# Altium PCB UWB_board.PcbDoc
Units mm, origin at the board's own origin, x right, y up, seen from the top; angles counter-clockwise.
Board outline 31.7 x 44.9 mm, 6 copper layers (Top Layer, Top Ground, Mid Layer, MCU_3V3, Bottom Ground, Bottom Layer), stack 1.597 mm thick; 55 components, 50 nets, 251 pads, 143 vias.
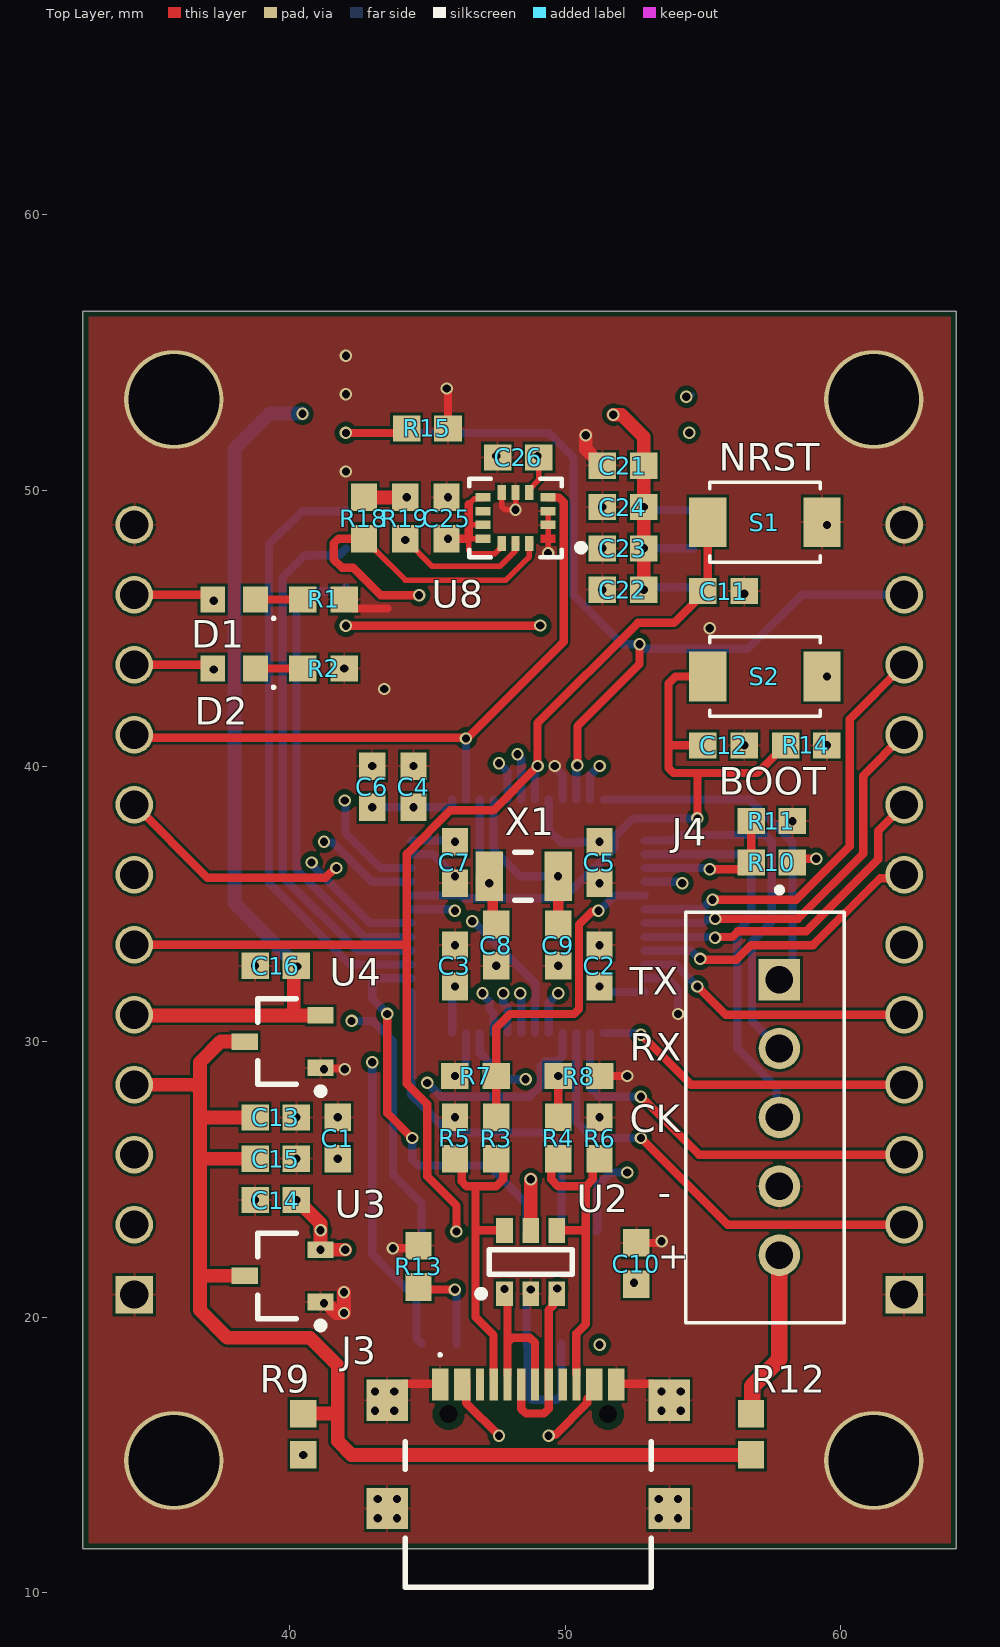
[diagram p0: Top Layer view]
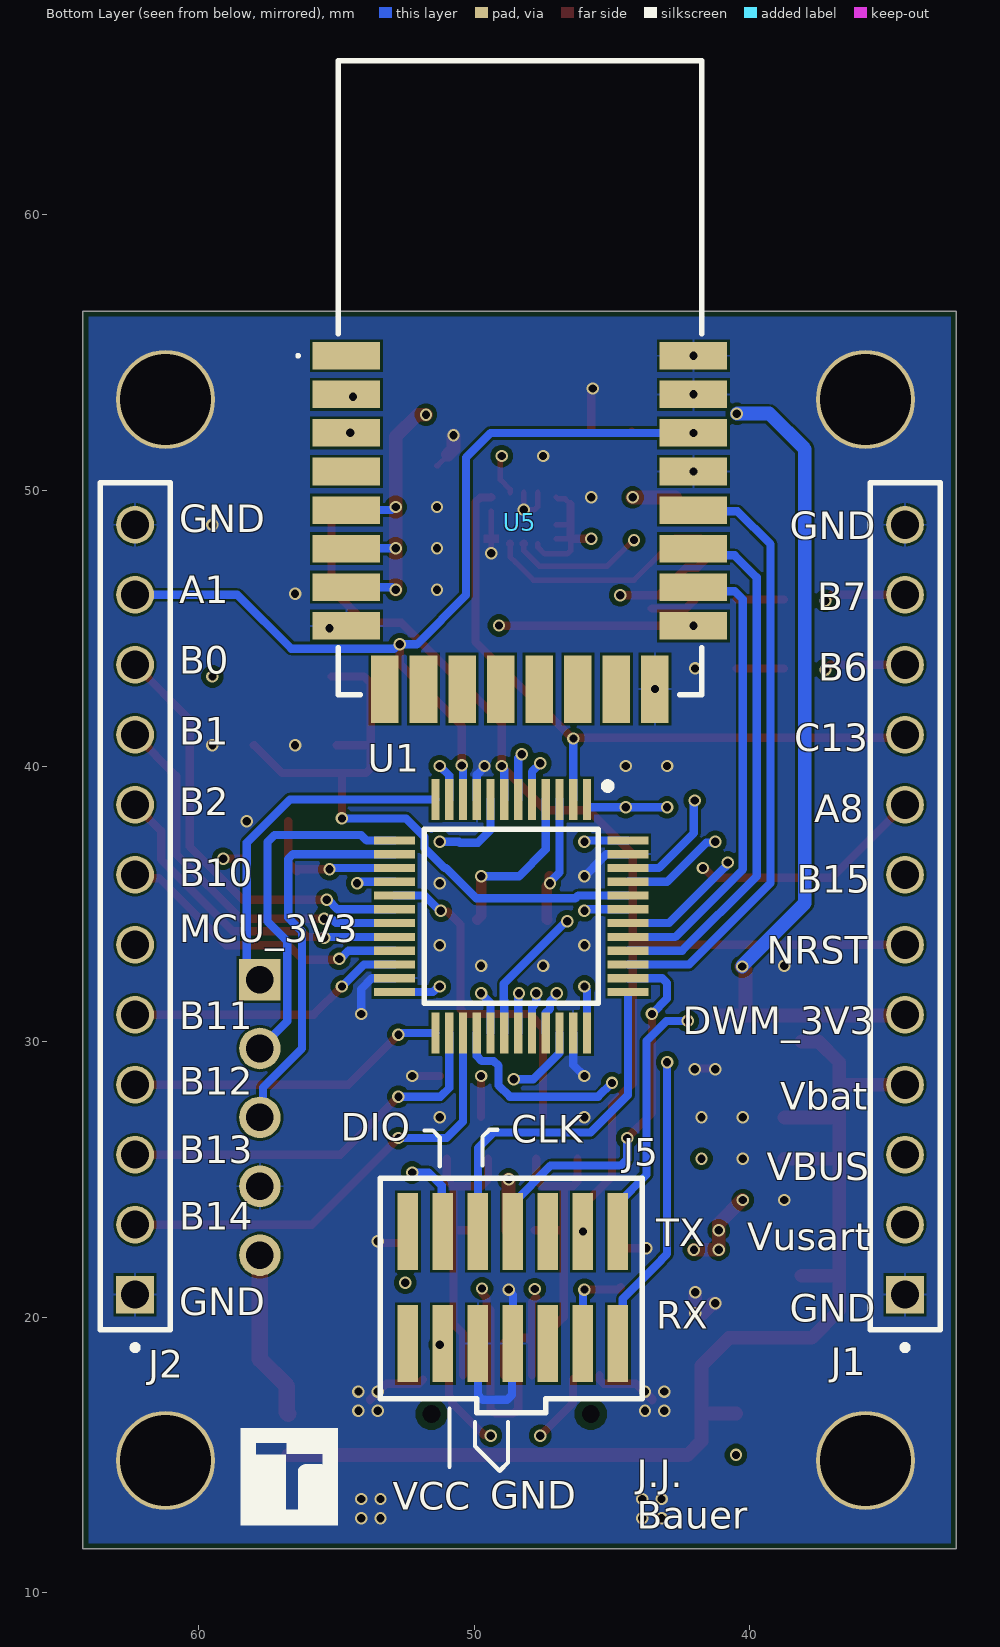
[diagram p1: Bottom Layer view, seen from below]
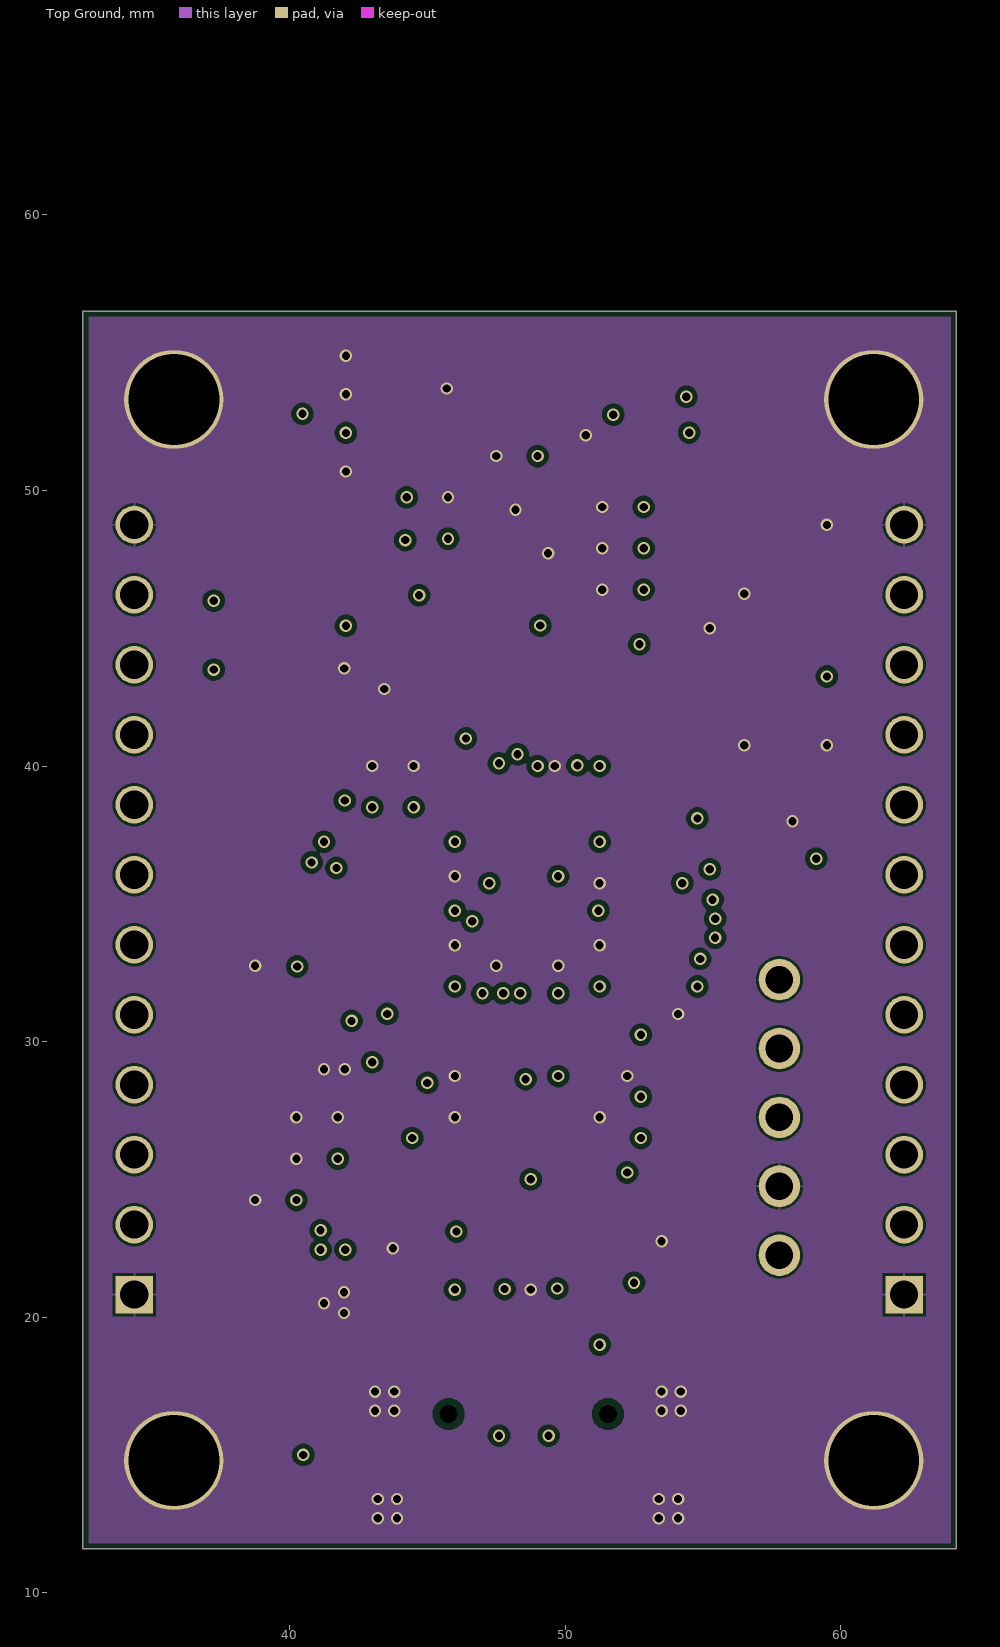
[diagram p2: Top Ground]
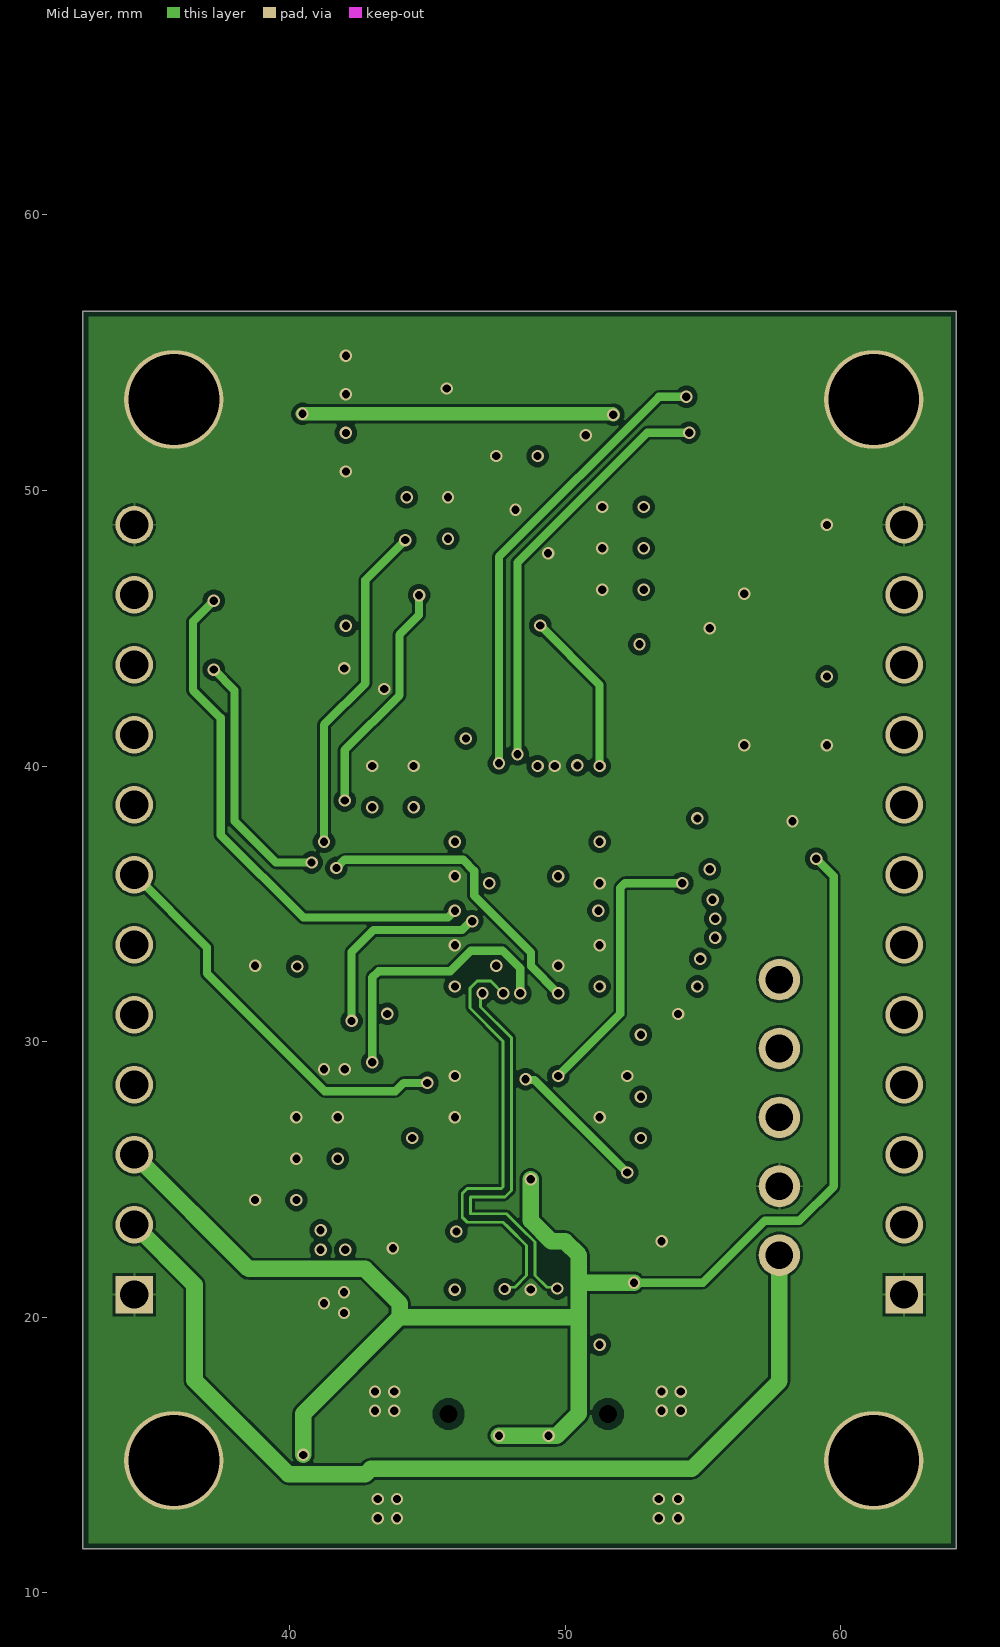
[diagram p3: Mid Layer]
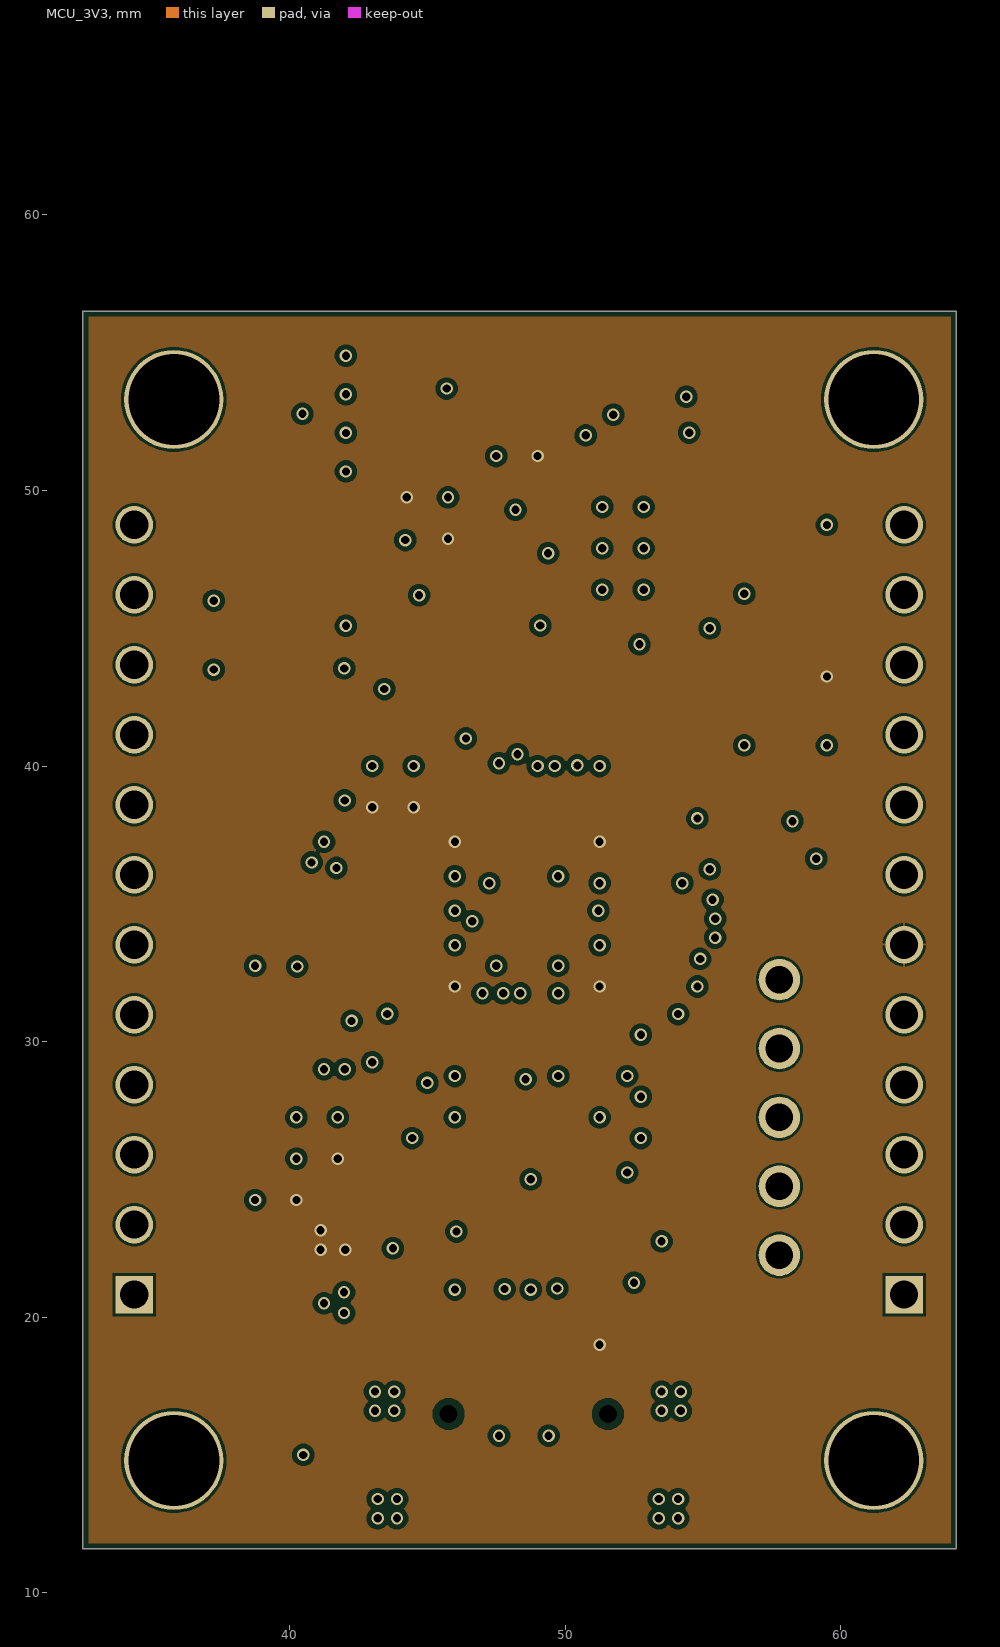
[diagram p4: MCU_3V3]
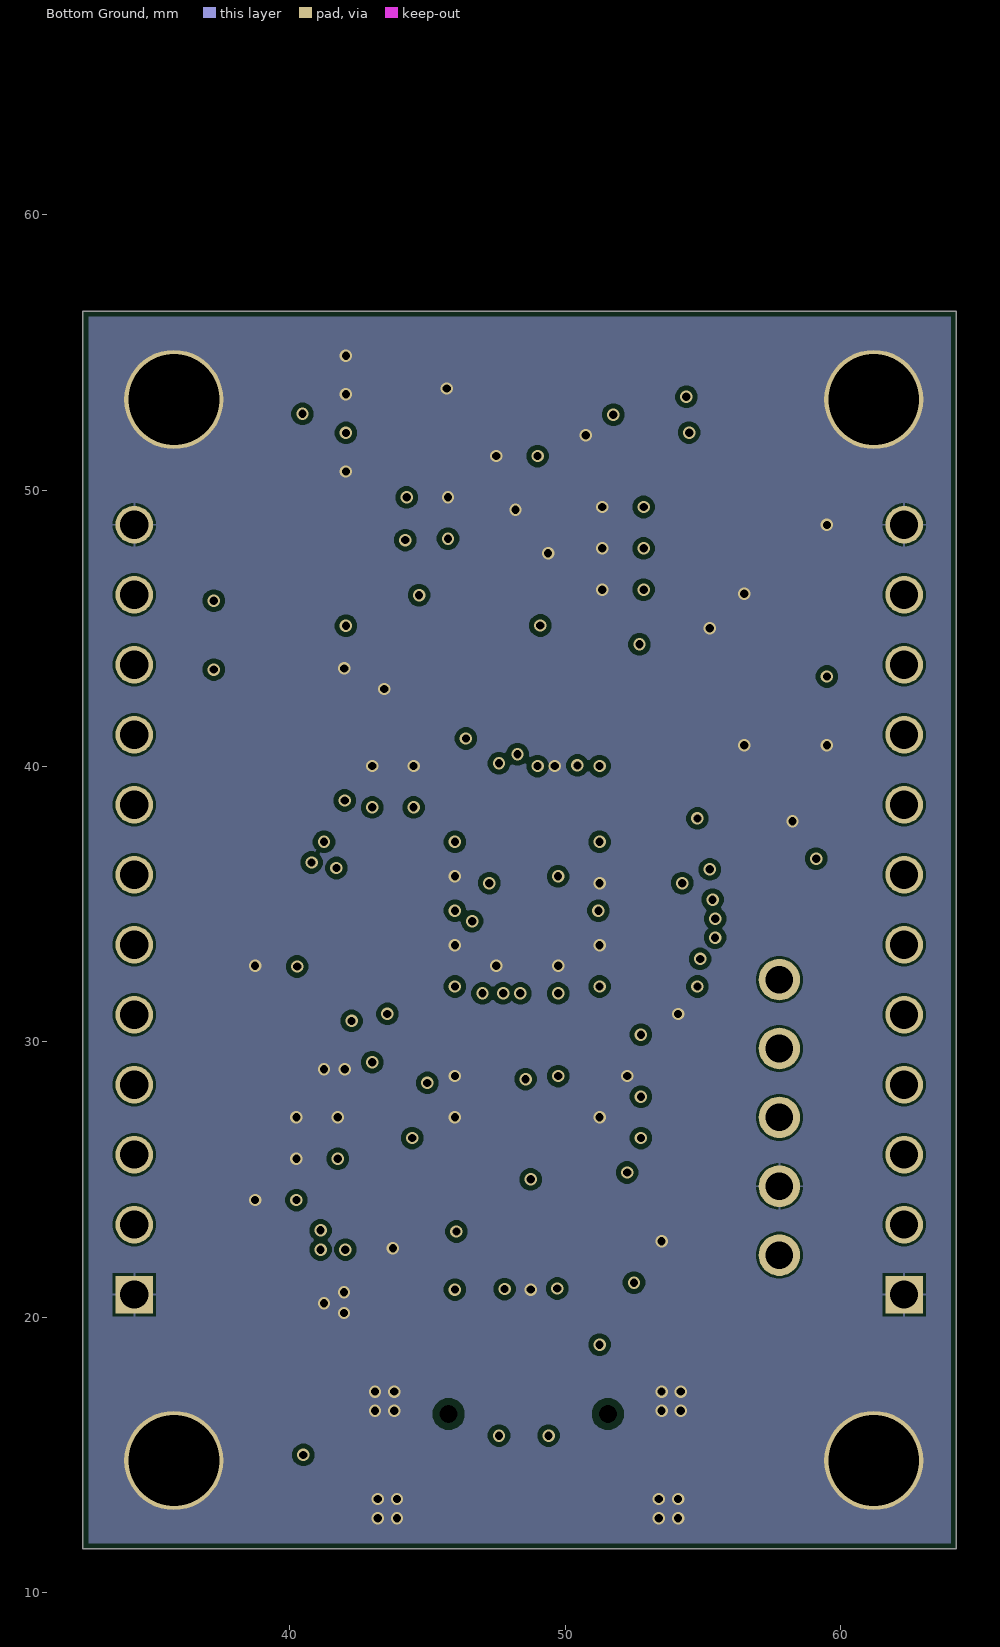
[diagram p5: Bottom Ground]
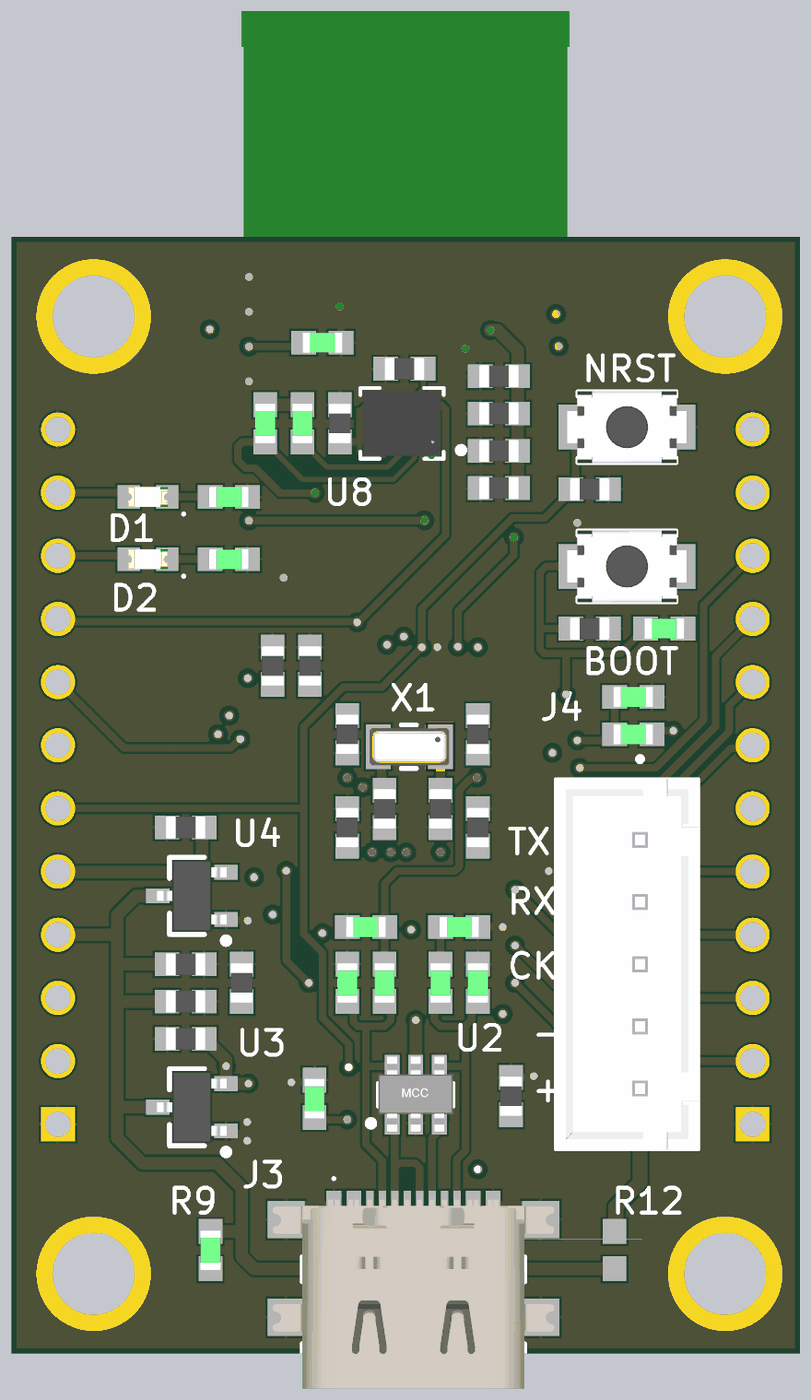
[diagram p6: 3D render of the assembled board from above, using the file's embedded part models]
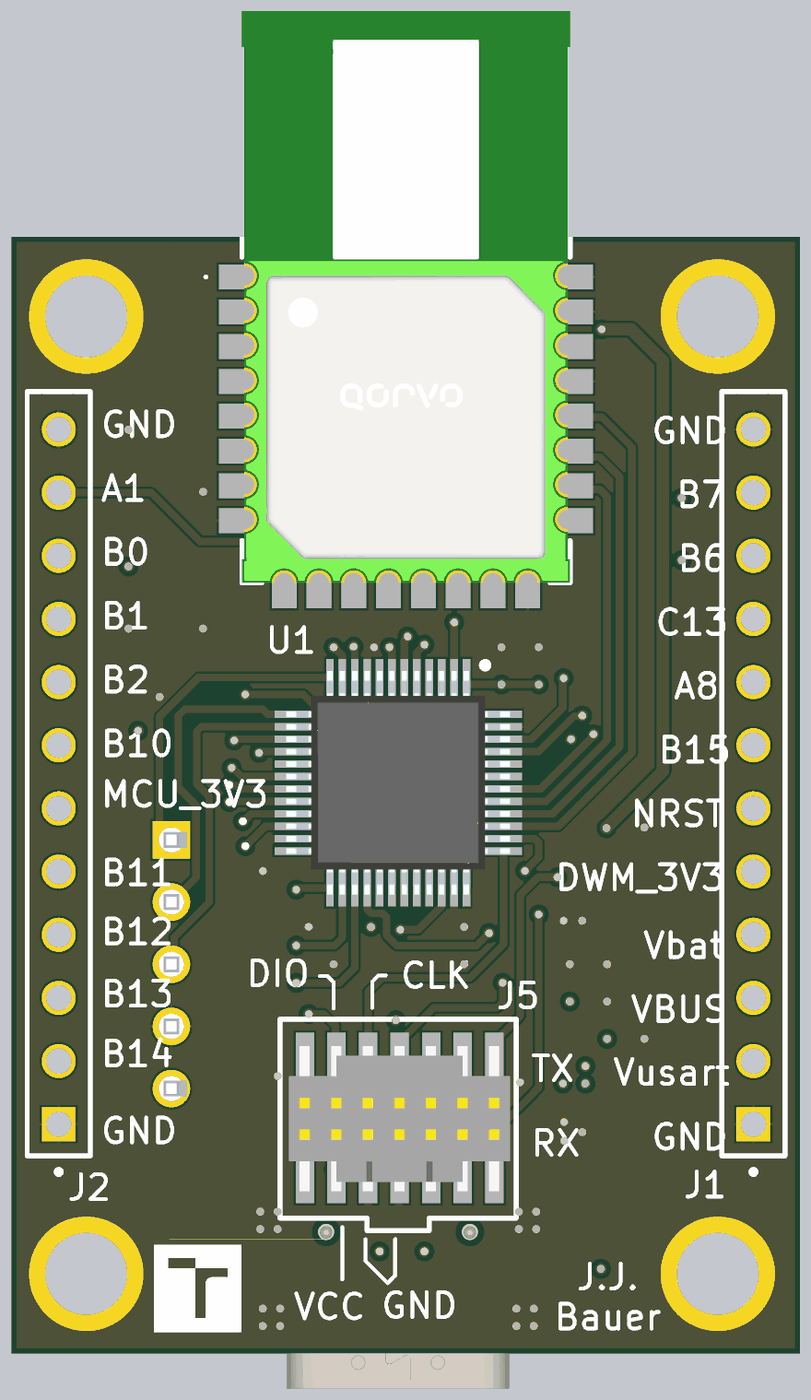
[diagram p7: 3D render of the assembled board from below, using the file's embedded part models]

## Layer stack, top to bottom
Top Solder: solder mask 0.0127, Solder Resist, Dk 3.8
Top Layer: signal copper 0.035
Dielectric 1: prepreg 0.1, 2313, Dk 4.05
Top Ground: signal copper 0.0175
Core 1: core 0.565, FR-4, Dk 4.5
Mid Layer: signal copper 0.0175
Dielectric 2: prepreg 0.127, 2116, Dk 4.25
MCU_3V3: signal copper 0.0175
Core 2: core 0.565, FR-4, Dk 4.5
Bottom Ground: signal copper 0.0175
Dielectric 3: prepreg 0.1, 2313, Dk 4.05
Bottom Layer: signal copper 0.035
Bottom Solder: solder mask 0.0127, Solder Resist, Dk 3.8

## Board outline
32.5,11.6 32.5,56.5 64.2,56.5 64.2,11.6

## Design rules (kind name [scope] priority, off if disabled: settings)
BoardOutlineClearance [All] p1: gap=0.2 ignorepadtopadclearanceinfootprint=FALSE
Clearance [All] p1: gap=0.089 ignorepadtopadclearanceinfootprint=TRUE except(0.127: Arc-Via Track-Via SMDPad-Via THPad-Via Via-Via Via-Fill Via-Poly Via-Region Via-Text; 0.25: Arc-Hole Track-Hole SMDPad-Hole THPad-Hole Via-Hole Fill-Hole Poly-Hole Region-Hole Text-Hole)
ComponentClearance [All] p1: gap=0.089 collisioncheckmode=3 verticalgap=0.089 showdistances=TRUE
DiffPairsRouting [All] p1: maxlimit=0.254 minlimit=0.089 mostfreqgap=0.089 toplayer_prefgap=0.102 toplayer_minwidth=0.089 toplayer_maxwidth=1816.048 toplayer_prefwidth=0.102 midlayer1_maxgap=0.089 midlayer1_minwidth=0.089 midlayer1_maxwidth=1816.048 midlayer1_prefwidth=0.089 midlayer2_prefgap=0.203 midlayer2_minwidth=0.089 midlayer2_maxwidth=1816.048 midlayer2_prefwidth=0.102 midlayer3_maxgap=0.089 midlayer3_minwidth=0.089 midlayer3_maxwidth=1816.048 midlayer3_prefwidth=0.089 midlayer4_maxgap=0.089 midlayer4_minwidth=0.089 midlayer4_maxwidth=1816.048 midlayer4_prefwidth=0.089 bottomlayer_prefgap=0.102 bottomlayer_minwidth=0.089 bottomlayer_maxwidth=1816.048 bottomlayer_prefwidth=0.102 maxuncoupledlength=12.7
Height [All] p1: minheight=0 maxheight=1816.048 prefheight=12.7
HoleSize [All] p1: absolutevalues=TRUE maxlimit=6.3 minlimit=0.2 maxpercent=80.000 minpercent=20.000
HoleToHoleClearance [All] p1: gap=0.25 allowstackedmicrovias=FALSE
MinimumAnnularRing [All] p1: minimumring=0.05
MinimumSolderMaskSliver [All] p1: minsoldermaskwidth=0
PlaneClearance [All] p1: clearance=0.089
PlaneConnect PlaneConnectPowerPads [InPadClass('PowerPads')] p1: planeconnectstyle=Direct reliefexpansion=0.508 reliefentries=4 reliefconductorwidth=0.254 reliefairgap=0.254
PlaneConnect [All] p2: pad.planeconnectstyle=Relief pad.reliefexpansion=0.3 pad.reliefentries=4 pad.reliefconductorwidth=0.089 pad.reliefairgap=0.089 via.planeconnectstyle=Direct via.reliefexpansion=0.3 via.reliefentries=4 via.reliefconductorwidth=0.127 via.reliefairgap=0.127
PolygonConnect PolygonConnectPowerPads [All vs (InPadClass('PowerPads'))] p1: connectstyle=Direct reliefconductorwidth=0.254 reliefentries=4 polygonreliefangle="90 Angle" airgapwidth=0.254
PolygonConnect [All] p2: thpad.connectstyle=Relief thpad.reliefconductorwidth=0.089 thpad.reliefentries=4 thpad.polygonreliefangle="90 Angle" thpad.airgapwidth=0.089 smdpad.connectstyle=Relief smdpad.reliefconductorwidth=0.089 smdpad.reliefentries=4 smdpad.polygonreliefangle="90 Angle" smdpad.airgapwidth=0.089 via.connectstyle=Direct via.reliefconductorwidth=0.127 via.reliefentries=4 via.polygonreliefangle="90 Angle" via.airgapwidth=0.127
RoutingVias [All] p1: holewidth=0.3 width=0.45 viastyle="Through Hole" minholewidth=0.3 minwidth=0.4 maxholewidth=0.5 maxwidth=0.65
SilkToSilkClearance [All] p1: silktosilkclearance=0
SilkToSolderMaskClearance [IsPad] p1: minsilkscreentomaskgap=0.089 clearancetoexposedcopper=TRUE
SolderMaskExpansion [All] p1: expansion=0 istentingtop=FALSE
SolderMaskExpansion SolderMaskExpansion_1 [All] p2: expansion=0.075 istentingtop=FALSE
SupplyNets "Schematic Supply Nets" [InNet('GND')] p1: voltage=0.000
Width [All] p1: maxlimit=1816.048 minlimit=0.089 preferedwidth=0.089 toplayer_prefwidth=0.102 bottomlayer_prefwidth=0.102 minimp=50.000000 maximp=50.000000 favimp=50.000000
20 further rules are at their usual default settings.

## Classes and differential pairs
component class USB: C10 J3 R3 R4 R5 R6 R7 R8 R9 R10 R11 U2
component class Power: C13 C14 C15 C16 U3 U4
component class HID: C11 C12 D1 D2 R1 R2 R14 S1 S2
component class DWM1000: C21 C22 C23 C24 R15 U5
component class Connectors: J4 J5 R12 R13
component class Accelerometer: C25 C26 R18 R19 U?
component class LSE_Oscilator: C8 C9 X1
component class MCU: C1 C2 C3 C4 C5 C6 C7 J1 U1
differential pair D: +D_P -D_N

## Components (designator, comment, footprint, x,y, rotation, side; value= is the part's Value field where it differs from the comment)
C1 "10uF" 0603_cap 41.75,26.5 r270 top
C2 "100nF" 0603_cap 51.25,32.75 r270 top
C3 "100nF" 0603_cap 46,32.75 r270 top
C4 "100nF" 0603_cap 44.5,39.25 r270 top
C5 "100nF" 0603_cap 51.25,36.5 r90 top
C6 "1uF" 0603_cap 43,39.25 r270 top
C7 "100nF" 0603_cap 46,36.5 r90 top
C8 "18pF" 0603_cap 47.5,33.5 r90 top
C9 "18pF" 0603_cap 49.75,33.5 r90 top
C10 "2.2uF" 0603_cap 52.584,21.944 r90 top
C11 "100nF" 0603_cap 55.75,46.35 r180 top
C12 "100nF" 0603_cap 55.75,40.75 r180 top
C13 "1uF" 0603_cap 39.5,27.25 r180 top
C14 "1uF" 0603_cap 39.5,24.25 r0 top
C15 "1uF" 0603_cap 39.5,25.75 r180 top
C16 "1uF" 0603_cap 39.5,32.75 r0 top
C21 "1uF" 0603_cap 52.1,50.9 r0 top
C22 "100nF" 0603_cap 52.1,46.4 r0 top
C23 "100nF" 0603_cap 52.1,47.9 r0 top
C24 "100nF" 0603_cap 52.1,49.4 r0 top
C25 "100nF" 0603_cap 45.7,49 r270 top
C26 "100nF" 0603_cap 48.3,51.2 r0 top
D1 "KT-0603W" 0603_LED 37.984,46.044 r180 top
D2 "KT-0603R" 0603_LED 37.984,43.544 r180 top
J1 "PinHeader" PINs 34.365,20.816 r90 bottom locked
J2 "PinHeader" PINs 62.305,20.816 r90 bottom locked
J3 "USB C" UJ20CHGSMT5P16TR 48.661,13.882 r0 top locked
J4 "USART" JST_B5B-XH-A 57.25,27.25 r90 top locked
J5 "14 pin" FTSH14 52.405,19.038 r90 bottom locked
R1 "220" 0603_res 41.234,46.044 r180 top value=220Ω
R2 "820" 0603_res 41.234,43.544 r180 top value=820Ω
R3 "100k" 0603_res 47.5,26.5 r270 top
R4 "100k" 0603_res 49.75,26.5 r270 top
R5 "5.1k" 0603_res 46,26.5 r270 top value=5.1kΩ
R6 "5.1k" 0603_res 51.25,26.5 r270 top value=5.1kΩ
R7 "100k" 0603_res 46.75,28.75 r0 top
R8 "100k" 0603_res 50.5,28.75 r180 top
R9 "0R" 0603_res 40.5,15.75 r90 top value=0Ω
R10 "33k" 0603_res 57.5,36.5 r0 top value=33kΩ
R11 "82k" 0603_res 57.5,38 r180 top value=82kΩ
R12 "Empty 0603" 0603_empty 56.75,15.75 r90 top value="Inf Ω"
R13 "100k" 0603_res 44.684,21.844 r270 top
R14 "5.1k" 0603_res 58.75,40.75 r180 top value=5.1kΩ
R15 "82k" 0603_res 45,52.25 r180 top value=82kΩ
R18 "4.7k" 0603_res 42.7,49 r90 top value=4.7kΩ
R19 "4.7k" 0603_res 44.2,49 r90 top value=4.7kΩ
S1 "NRST" SW_TS-1088-AR02016 57.25,48.85 r180 top
S2 "BOOT" SW_TS-1088-AR02016 57.25,43.25 r180 top
U1 "STM32L433CCT" LQFP50 48.655,34.55 r270 bottom locked
U2 "ESD" sot-23-6L_ESD 48.75,22 r0 top locked
U3 "LDO" SOT95P280X120-3N 39.75,21.5 r0 top locked
U4 "LDO" SOT95P280X120-3N 39.75,30 r0 top locked
U5 "DWM3000" DWM1000 48.34,54.09 r180 bottom locked
U8 "LSM6DSVTR" LGA14-L_2p59x3P1x0P5_STM 48.2,49 r180 top locked (schematic designator U?)
X1 "Q13FC13500004" SMD3215-2P 48.5,36 r180 top

## Footprints (in the part's own frame and the unit in brackets; to place one, negate y for a bottom-side part, rotate by r counter-clockwise, add the part's x,y. Pads: shape width x height; smd on the part's side, far side on the other; paste and mask are expansions set on the pad)
0603_cap [mm] "2-Leads, Body 1,60x0,80mm, IPC Medium Density"
  rect 1x0.95 smd: 1(-0.75,0) 2(0.75,0)
  body extent -0.8,-0.45 0.8,0.45, height 0.8
0603_empty [mm] "2-Leads, Body 1,60x0,80mm, IPC Medium Density"
  rect 1x0.95 smd: 1(-0.75,0) 2(0.75,0)
0603_LED [mm] "Chip Diode, 2-Leads, Body 1,60x0,80mm, IPC Medium Density"
  rect 0.9x0.95 smd: A(0.775,0) C(-0.775,0)
  silkscreen extent -1.49,0.64 -1.39,0.74, body extent -0.8,-0.4 0.8,0.4, height 0.6
0603_res [mm] "2-Leads, Body 1,60x0,80mm, IPC Medium Density"
  rect 1x0.95 smd: 1(-0.75,0) 2(0.75,0)
  body extent -0.8,-0.4 0.8,0.4, height 0.55
DWM1000 [mm]
  rect 2.45x1 smd: 1(-6.295,0.8) 2(-6.295,-0.6) 3(-6.295,-2) 4(-6.295,-3.4) 5(-6.295,-4.8) 6(-6.295,-6.2) 7(-6.295,-7.6) 8(-6.295,-9) 17(6.295,-9) 18(6.295,-7.6) 19(6.295,-6.2) 20(6.295,-4.8) 21(6.295,-3.4) 22(6.295,-2) 23(6.295,-0.6) 24(6.295,0.8)
  rect 1x2.45 smd: 9(-4.9,-11.295) 10(-3.5,-11.295) 11(-2.1,-11.295) 12(-0.7,-11.295) 13(0.7,-11.295) 14(2.1,-11.295) 15(3.5,-11.295) 16(4.9,-11.295)
  silkscreen extent -8.1,-11.5 6.6,11.5, body extent -6.6,-11.5 6.6,11.5, height 3.15
FTSH14 [mm]
  rect 2.79x0.74 smd: 1(0,0) 2(4.07,0) 3(0,-1.27) 4(4.07,-1.27) 5(0,-2.54) 6(4.07,-2.54) 7(0,-3.81) 8(4.07,-3.81) 9(0,-5.08) 10(4.07,-5.08) 11(0,-6.35) 12(4.07,-6.35) 13(0,-7.62) 14(4.07,-7.62)
  silkscreen extent -2.5,-8.5 6,1, body extent -0.92,-8.25 4.92,0.64, height 6.11
JST_B5B-XH-A [mm]
  rect 1.508x1.508 / inner round 1.508 / far side rect 1.508x1.508 hole 1: 1(5,-0.525)
  round 1.508 hole 1: 2(2.5,-0.525) 3(0,-0.525) 4(-2.5,-0.525) 5(-5,-0.525)
  silkscreen extent -7.45,-2.88 8.35,2.88, body extent -7.45,-2.88 7.45,2.88, height 7
LGA14-L_2p59x3P1x0P5_STM [mil]
  round 1 smd paste+0 mask+0: 1(-46.5,29.53)
  rect 21x12 smd paste+0 mask+0: 2(-46.5,9.84) 3(-46.5,-9.84) 4(-46.5,-29.53) 8(46.5,-29.53) 9(46.5,-9.84) 10(46.5,9.84) 11(46.5,29.53)
  rect 12x21 smd paste+0 mask+0: 5(-19.68,-36.5) 6(0,-36.5) 7(19.68,-36.5) 12(19.68,36.5) 13(0,36.5) 14(-19.68,36.5)
  Top Layer region: -36,35.53 -57,35.53 -57,23.53 -36,23.53
  silkscreen extent -98,-56 66,56, body extent -61,-51 61,51, height 34
LQFP50 [mm]
  rect 1.475x0.3 smd: 1(-4.238,2.75) 2(-4.238,2.25) 3(-4.238,1.75) 4(-4.238,1.25) 5(-4.238,0.75) 6(-4.238,0.25) 7(-4.238,-0.25) 8(-4.238,-0.75) 9(-4.238,-1.25) 10(-4.238,-1.75) 11(-4.238,-2.25) 12(-4.238,-2.75) 25(4.238,-2.75) 26(4.238,-2.25) 27(4.238,-1.75) 28(4.238,-1.25) 29(4.238,-0.75) 30(4.238,-0.25) 31(4.238,0.25) 32(4.238,0.75) 33(4.238,1.25) 34(4.238,1.75) 35(4.238,2.25) 36(4.238,2.75)
  rect 0.3x1.475 smd: 13(-2.75,-4.238) 14(-2.25,-4.238) 15(-1.75,-4.238) 16(-1.25,-4.238) 17(-0.75,-4.238) 18(-0.25,-4.238) 19(0.25,-4.238) 20(0.75,-4.238) 21(1.25,-4.238) 22(1.75,-4.238) 23(2.25,-4.238) 24(2.75,-4.238) 37(2.75,4.238) 38(2.25,4.238) 39(1.75,4.238) 40(1.25,4.238) 41(0.75,4.238) 42(0.25,4.238) 43(-0.25,4.238) 44(-0.75,4.238) 45(-1.25,4.238) 46(-1.75,4.238) 47(-2.25,4.238) 48(-2.75,4.238)
  silkscreen extent -4.85,-3.15 3.15,3.62, body extent -4.5,-4.5 4.5,4.5, height 1.6
PINs [mm]
  rect 1.37x1.37 hole 1.02: 1(0,0)
  round 1.37 hole 1.02: 2(2.54,0) 3(5.08,0) 4(7.62,0) 5(10.16,0) 6(12.7,0) 7(15.24,0) 8(17.78,0) 9(20.32,0) 10(22.86,0) 11(25.4,0) 12(27.94,0)
  silkscreen extent -2.02,-1.27 29.47,1.27
SMD3215-2P [mm]
  rect 1x1.8 smd mask+0.102: 1(-1.245,0)
  rect 1x1.8 smd: 2(1.25,0)
  silkscreen extent -0.27,-0.87 0.33,0.87, body extent -1.6,-0.75 1.6,0.75, height 0.81
SOT95P280X120-3N [mm] "SOT23, 3-Leads, Body 2,90x2,80mm, Pitch 0,95mm, IPC Medium Density"
  rect 0.95x0.6 smd: 1(1.375,-0.95) 2(1.375,0.95) 3(-1.375,0)
  silkscreen extent -0.9,-1.92 1.5,1.55, body extent -1.4,-1.45 1.4,1.45, height 1.3
sot-23-6L_ESD [mm] "SOT23, 6-Leads, Body 2,90x2,80mm, Pitch 0,95mm, IPC Medium Density"
  rect 0.6x0.9 smd: 1(-0.95,-1.15) 2(0,-1.15) 3(0.95,-1.15) 4(0.95,1.15) 5(0,1.15) 6(-0.95,1.15)
  silkscreen extent -1.92,-1.27 1.5,0.45, body extent -1.5,-1.48 1.5,1.53, height 1.11
SW_TS-1088-AR02016 [mm]
  rect 1.35x1.8 smd: 1(-2.075,0) 2(2.075,0)
  silkscreen extent -2,-1.45 2,1.45, body extent -2.4,-1.45 2.4,1.45, height 2
UJ20CHGSMT5P16TR [mm]
  rect 0.6x1.15 smd: A1(-3.2,3.678) A4(-2.4,3.678) B1(3.2,3.678) B4(2.4,3.678)
  rect 0.3x1.15 smd: A5(-1.25,3.678) A6(-0.25,3.678) A7(0.25,3.678) A8(1.25,3.678) B5(1.75,3.678) B6(0.75,3.678) B7(-0.75,3.678) B8(-1.75,3.678)
  round 0.325 hole 0.65 unplated: MH1(-2.89,2.603) MH2(2.89,2.603)
  rect 1.5x1.5 smd: MP1(-5.12,3.103) MP2(5.12,3.103) MP3(-5.12,-0.827) MP4(5.12,-0.827)
  silkscreen extent -4.47,-3.68 4.47,4.8, body extent -5.67,-3.7 5.67,3.9, height 3.18

## Part data
C1: library part CL10A106KP8NNNC, "100nF 50V X7R ±10% 0603 Multilayer Ceramic Capacitors MLCC - SMD/SMT ROHS", LCSC Part #=C19702
C2 C3 C4 C5 C7 C11 C12 C22 C23 C24 C25 C26: library part CC0603KRX7R9BB104, "100nF 50V X7R ±10% 0603 Multilayer Ceramic Capacitors MLCC - SMD/SMT ROHS", LCSC Part #=C14663
C6 C13 C14 C15 C16 C21: library part CL10A105KB8NNNC, "1uF 50V X5R ±10% 0603 Multilayer Ceramic Capacitors MLCC - SMD/SMT ROHS", LCSC Part #=C15849
C8 C9: library part CL10C180JB8NNNC, "18pF 50V C0G ±5% 0603 Multilayer Ceramic Capacitors MLCC - SMD/SMT ROHS", LCSC Part #=C1647
C10: library part CL10A225KO8NNNC, "2.2uF 16V X5R ±10% 0603 Multilayer Ceramic Capacitors MLCC - SMD/SMT ROHS", LCSC Part #=C23630
D1: "100mW 120° 2.6V~3.1V 360mcd 5mA Discrete Diode White Yellow Lens op View Mount 0603 LED Indication - Discrete ROHS", LCSC Part #=C2290
D2: "-40℃~+85℃ 120° 2.4V 20mA 300mcd 40mW 615nm~630nm 645nm Red Water Clear 0603 LED Indication - Discrete ROHS", LCSC Part #=C2286
J3: library part UJ20-C-H-G-SMT-5-P16-TR, "Type C, USB 2.0, 480 Mbps, 48 Vac, 5 A, Horizontal, Gold Plated 3u, Surface Mount with post, 16 pin, USB Receptacle", LCSC Part #=C22383469, Mouser Part Number=179-UJ20CHGSMT5P16TR
J4: library part S5B-XH-A_LF__SN_, "comunication to master"
J5: library part FTSH-107-01-LM-DV-K, "For SWD debug"
R1: library part 0603WAF2200T5E, "220Ω -55℃~+155℃ 100mW 75V Thick Film Resistor ±1% ±100ppm/℃ 0603 Chip Resistor - Surface Mount ROHS", LCSC Part #=C22962
R2: library part 0603WAF8200T5E, "820Ω -55℃~+155℃ 100mW 75V Thick Film Resistor ±1% ±100ppm/℃ 0603 Chip Resistor - Surface Mount ROHS", LCSC Part #=C23253
R3 R4 R7 R8 R13: library part 0603WAF1003T5E, "100kΩ -55℃~+155℃ 100kΩ 100mW 75V Thick Film Resistor ±1% ±100ppm/℃ 0603 Chip Resistor - Surface Mount ROHS", LCSC Part #=C25803
R5 R6 R14: library part 0603WAF5101T5E, "5.1kΩ -55℃~+155℃ 100mW 75V Thick Film Resistor ±1% ±100ppm/℃ 0603 Chip Resistor - Surface Mount ROHS", LCSC Part #=C23186
R9: library part 0603WAF0000T5E, "0Ω -55℃~+155℃ 100mW 75V Thick Film Resistor ±1% ±100ppm/℃ 0603 Chip Resistor - Surface Mount ROHS", LCSC Part #=C21189
R10: library part 0603WAF3302T5E, "33kΩ -55℃~+155℃ 100mW 75V Thick Film Resistor ±1% ±100ppm/℃ 0603 Chip Resistor - Surface Mount ROHS", LCSC Part #=C4216
R11 R15: library part 0603WAF8202T5E, "82kΩ -55℃~+155℃ 100mW 75V Thick Film Resistor ±1% ±100ppm/℃ 0603 Chip Resistor - Surface Mount ROHS", LCSC Part #=C23254
R12: library part 0603_empty, "empty space for 0603 device", LCSC Part #=None
R18 R19: library part 0603WAF4701T5E, "4.7kΩ -55℃~+155℃ 100mW 75V Thick Film Resistor ±1% ±100ppm/℃ 0603 Chip Resistor - Surface Mount ROHS", LCSC Part #=C23162
S1 S2: library part TS-1088-AR02016, "50mA 4mm 100MÎ© 100,000 Times 12V 160gf 3mm 2mm Round Button Vertical welding SPST SMD Tactile Switches ROHS", LCSC Part #=C720477
U1: Manufacturer_Name=STMicroelectronics, Manufacturer_Part_Number=STM32L433CCT
U2: library part SRV05-4, "-55℃~+155℃ 12.5V 1pF 5 5A 5V 5uA 6V 75W ESD IEC 61000-4-2 Unidirectional SOT-23-6L ESD and Surge Protection (TVS/ESD) ROHS", LCSC Part #=C7420376
U3 U4: library part XC6206P332MR-G, "-40℃~+85℃@(Ta) 1 1uA 200mA 3.3V 6V Fixed Over Current Protection Positive SOT-23-3L Voltage Regulators - Linear, Low Drop Out (LDO) Regulators ROHS", LCSC Part #=C5446
U5: library part DWM1000, "3.5 - 6.5 GHz Ultra-Wideband (UWB) Transceiver Module", Manufacturer_Name=Qorvo, Mouser Part Number=772-DWM1000, Datasheet Link=https://www.qorvo.com/products/d/da007948, Geometry.Height=3.15mm, Manufacturer_Part_Number=DWM1000, Mouser Price/Stock=https://www.mouser.co.uk/ProductDetail/Qorvo/DWM1000?qs=TiOZkKH1s2R6b5D6df63Pg%3D%3D
U8: library part LSM6DSVETR, "6-axis IMU with embedded sensor fusion, I3C, OIS/EIS for smart applications", LCSC Part #=C41785564
X1: "-40℃~+85℃ 12.5pF 32.768kHz 70kΩ Crystal Oscillator ±20ppm SMD3215-2P Crystals ROHS", LCSC Part #=C32346, ComponentLink1Description="New link", ComponentLink1URL=https://jlcpcb.com/partdetail/SeikoEpson-Q13FC13500004/C32346, Parameter=32,768kHz

## Free pads (board coordinates)
  round 3.6 hole 3.3 mask+0.5: 7(35.8,14.8) 7(35.8,53.3) 7(61.2,14.8) 7(61.2,53.3)

## Via types
v1: diameter 0.45, hole 0.3, Top Layer to Bottom Layer, tented both sides, 143 vias

## Nets (pads, with @x,y where several pads share a name; then routed paths per layer and width w, separated by ;. In a path a pad name is that pad's centre, name@x,y a point inside that pad or via, vN(x,y) a via of type N, cw(c..) or ccw(c..) an arc to the next point about the centre after c; other vN are vias at no path point)
CC1: J3.A5 R3.2 R5.2 U2.6 | length 11.5
  Top Layer w0.3: R5.2@46.25,25.75 46.25,24.926 46.426,24.75 46.75,24.75 ; J3.A5@47.405,17.89 47.405,19.345 46.75,20 46.75,23.25 ; R3.2@47.75,25.75 47.75,25 47.5,24.75 46.75,24.75 ; U2.6 46.85,23.15 46.75,23.25 ; 46.75,23.25 46.75,24.75
CC2: J3.B5 R4.2 R6.2 U2.4 | length 11.2
  Top Layer w0.3: R4.2@49.5,25.75 49.5,25 49.75,24.75 50.75,24.75 ; U2.4 50.65,23.15 ; J3.B5@50.405,17.89 50.405,19.405 50.75,19.75 50.75,24.75 ; R6.2@51,25.75 51,25 50.75,24.75
D_N: J3.A7 J3.B7 U1.32 U2.1 | length 23.2
  Top Layer w0.3: U2.1@47.749,20.706 47.905,20.55 47.905,19.074 ; J3.B7@47.905,17.89 47.905,19.074 ; J3.A7@48.905,17.89 48.905,19.074 48.729,19.25 48.081,19.25 47.905,19.074
  Mid Layer w0.103: v1(47.75,31.75) 47.299,32.202 46.813,32.202 46.548,31.937 46.548,31.214 47.75,30.012 47.75,25.5 47.75,24.729 47.69,24.668 46.446,24.668 46.266,24.489 46.266,23.625 46.446,23.445 47.752,23.445 47.953,23.244 48.602,22.595 48.602,21.512 48.178,21.087 47.869,21.087 v1(47.803,21.021)
  Bottom Layer w0.3: v1(47.75,31.75) 47.752,31.748 47.752,31.397 47.905,31.244 U1.32
D_P: J3.A6 J3.B6 U1.33 U2.3 | length 23.1
  Top Layer w0.3: J3.A6@48.405,17.89 48.405,16.676 48.581,16.5 49.229,16.5 49.405,16.676 49.405,20.255 49.55,20.4 49.55,20.7 U2.3
  Mid Layer w0.103: v1(47,31.75) 46.934,31.684 46.934,31.261 48.056,30.139 48.056,25.5 48.056,24.602 47.816,24.362 46.572,24.362 46.572,23.751 47.879,23.751 48.386,23.244 48.908,22.722 48.908,21.512 49.337,21.083 49.673,21.083 v1(49.716,21.04)
  Bottom Layer w0.3: v1(47,31.75) 47,31.709 47.252,31.457 47.252,31.19 47.405,31.037 U1.33
DWM_3V3: C16.2 C21.2 C22.2 C23.2 C24.2 J1.5 U4.2 U5.5 U5.6 U5.7 | length 55
  Top Layer w0.5: J1.5@34.391,30.95 40.15,30.95 ; C16.2@40.3,32.725 v1(40.275,32.725) 40.15,32.6 40.15,30.95 ; U4.2 40.15,30.95 ; v1(51.75,52.75) 52.05,52.75 52.85,51.95 C21.2 v1(52.85,49.4) v1(52.85,47.9) v1(52.85,46.4)
  Mid Layer w0.5: v1(40.469,52.781) 51.719,52.781 v1(51.75,52.75)
  Bottom Layer w0.3: v1(52.85,46.4) 52.891,46.4 52.981,46.49 U5.7 ; v1(52.85,47.9) 54.625,47.9 U5.6 ; v1(52.85,49.4) 52.891,49.4 53.001,49.29 U5.5
  Bottom Layer w0.5: v1(40.275,32.725) 40.275,32.75 38,35.025 38,51.5 39.293,52.793 40.457,52.793 v1(40.469,52.781)
GND: C1.1 C2.1 C3.1 C4.1 C5.1 C6.1 C7.1 C8.1 C9.1 C10.2 C11.1 C12.1 C13.1 C14.1 C15.1 C16.1 C21.1 C22.1 C23.1 C24.1 C25.1 C26.1 J1.1 J1.12 J2.1 J2.12 J3.A1 J3.B1 J3.MP1 J3.MP2 J3.MP3 J3.MP4 J4.4 J5.5 J5.7 pad.7 R1.1 R2.1 R5.1 R6.1 R7.1 R8.1 R11.1 R13.1 R14.1 R15.1 S1.1 U1.9 U1.23 U1.35 U1.47 U2.2 U3.1 U4.1 U5.8 U5.16 U5.21 U5.23 U5.24 U8.1 U8.2 U8.3 U8.6 U8.7 | length 32.9
  Top Layer w0.2: U8.7 47.7,49.417 47.817,49.3 v1(48.2,49.3) U8.6 ; U8.3 U8.2 U8.1 v1(49.381,47.719) v1@49.4,47.7 ; C21.1@50.95,51.3 50.95,51.275 51.325,50.9 C21.1
  Top Layer w0.3: v1(41.25,29) 41.275,29.025 41.975,29.025 v1(42,29) ; R1.1 42.309,45.719 43.552,45.719 ; v1(43.75,22.5) 44.59,22.5 R13.1 ; v1(43.8,17.3) 43.541,17.041 J3.MP1 44.141,17.585 45.311,17.585 45.455,17.729 J3.A1@45.455,17.89 ; v1(45.7,53.7) 45.7,53.659 45.75,53.609 R15.1 ; R8.1 v1(52.25,28.75) ; J3.B1@51.855,17.74 52.011,17.585 53.181,17.585 J3.MP2 53.781,17.019 v1(53.5,17.3) ; C10.2 53.403,22.694 53.459,22.75 v1(53.5,22.75)
  Top Layer w0.5: v1(41.25,20.5) 41.35,20.5 41.7,20.15 v1(41.975,20.15) v1(41.975,20.9) ; v1(50.75,52) 50.75,51.5 C21.1@50.95,51.3
  Bottom Layer w0.3: U1.47 45.2,36.8 45.393,36.607 v1(46,36) ; v1(46,28.75) 46.405,29.155 U1.35 ; v1(48.75,21) 48.75,20.959 48.595,20.804 J5.7 48.631,19.002 48.631,17.176 48.807,17 49.689,17 49.865,17.176 J5.5 ; v1(49.625,40) 49.625,39.959 49.905,39.679 U1.9 ; U1.23 53.7,32.3 54.1,31.9 v1(54.1,31)
  other v1: 43.2,12.7 43.9,12.7 53.4,12.7 54.1,12.7 43.2,13.4 43.9,13.4 53.4,13.4 54.1,13.4 43.1,16.6 43.8,16.6 53.5,16.6 54.2,16.6 43.1,17.3 54.2,17.3 38.75,24.25 40.25,25.75 40.25,27.25 41.75,27.25 46,27.25 51.25,27.25 38.75,32.75 47.5,32.75 49.75,32.75 46,33.5 51.25,33.5 51.25,35.75 58.25,38 43,40 44.5,40 56.5,40.75 59.5,40.75 43.44,42.795 41.984,43.544 55.25,45 56.5,46.25 51.35,46.4 51.35,47.9 59.5,48.75 51.35,49.4 45.75,49.75 42.045,50.69 47.5,51.25 42.045,53.49 42.045,54.89
MCU_3V3: C1.2 C2.2 C3.2 C4.2 C5.2 C6.2 C7.2 C14.2 C25.2 C26.2 J2.6 J5.3 R18.2 R19.2 S2.1 U1.1 U1.8 U1.24 U1.36 U1.48 U3.2 U8.5 U8.8 U8.10 U8.11 U8.12 | length 23.1
  Top Layer w0.2: 46.502,48.798 46.55,48.75 U8.10 ; 46.502,49.502 46.698,49.698 46.966,49.698 U8.8 ; U8.11 46.502,48.25 46.5,48.248 46.5,47.817 46.617,47.7 47.441,47.7 47.7,47.959 U8.12 ; U8.5 48.7,50.041 49.05,50.391 C26.2
  Top Layer w0.3: v1(40.25,24.25) C14.2@40.275,24.25 ; C25.2 v1(45.75,48.25) 46.481,48.25 46.487,48.255 ; 46.502,48.25 46.502,48.798 46.502,49.502
  Top Layer w0.5: C14.2@40.275,24.25 41.125,23.4 v1(41.125,23.15) v1(41.125,22.45) v1(42.025,22.45) ; R18.2 v1(44.25,49.75)
  Bottom Layer w0.3: v1(43,38.5) v1(44.5,38.5) 45.905,38.5 U1.1 ; U1.48 45.909,37.3 45.959,37.25 v1(46,37.25) ; U1.36 45.905,31.864 46,31.959 v1(46,32) ; U1.8 49.405,37.676 49.863,37.218 50.52,37.218 50.552,37.25 v1(51.25,37.25) ; v1(51.25,32) 51.291,32 51.491,31.8 U1.24
  other v1: 51.25,19 41.75,25.75 59.5,43.25 49,51.25
NetC8_2: C8.2 U1.3 X1.2 | length 4.8
  Top Layer w0.381: X1.2 v1(47.25,35.75) 47.375,35.625 47.375,34.446 C8.2@47.353,34.424
  Bottom Layer w0.3: U1.3 46.905,36.136 47.25,35.791 v1(47.25,35.75)
NetC9_2: C9.2 U1.4 X1.1 | length 6.2
  Top Layer w0.381: v1(49.745,36) 49.747,35.997 49.747,34.559 49.883,34.424 C9.2@49.893,34.424
  Bottom Layer w0.3: U1.4 47.405,36.973 48.378,36 v1(49.745,36)
NetC12_2: C12.2 R14.2 S2.2 U1.44 | length 24.1
  Top Layer w0.3: v1(54.8,38.1) 54.8,39.65 54.9,39.75 ; C12.2 53.75,40.75 ; S2.2 54,43.25 53.75,43 53.75,40.75 ; R14.2 57.975,40.75 56.975,39.75 54.9,39.75 ; 53.75,40.75 53.75,39.926 53.926,39.75 54.9,39.75
  Bottom Layer w0.3: U1.44 46.228,35.3 46.328,35.2 49.922,35.2 51.022,36.3 51.078,36.3 51.8,37.022 51.8,37.432 52.468,38.1 v1(54.8,38.1)
NetD1_C: D1.C R1.2 | length 1.7
  Top Layer w0.3: D1.C R1.2
NetD2_C: D2.C R2.2 | length 1.7
  Top Layer w0.3: D2.C R2.2
NetJ1_2: J1.2 J4.5 R12.2 | length 41.3
  Top Layer w0.6: R12.2 56.799,16.549 56.799,17.499 57.775,18.475 J4.5
  Mid Layer w0.6: J1.2 36.55,21.171 36.55,17.71 39.96,14.3 42.751,14.3 42.951,14.5 54.6,14.5 57.775,17.675 J4.5
NetJ4_1: J4.1 U1.12 | length 12.7
  Bottom Layer w0.3: U1.12 56.684,38.788 58.25,37.222 58.25,32.725 J4.1
NetJ4_2: J4.2 U1.13 | length 13
  Bottom Layer w0.3: U1.13 53.9,37.3 54.1,37.5 57.25,37.5 57.5,37.25 57.5,34.358 56.782,33.64 56.782,30.743 J4.2
NetJ4_3: J4.3 U1.14 | length 14.1
  Bottom Layer w0.3: U1.14 56.574,36.8 56.75,36.624 56.75,34.5 56.25,34 56.25,29.75 57.667,28.333 57.667,27.358 J4.3
NetJ5_4: J5.4 U1.34 | length 10.8
  Mid Layer w0.3: v1(48.566,28.638) 48.595,28.61 48.89,28.61 v1(52.25,25.25)
  Bottom Layer w0.3: U1.34 46.905,29.587 47.853,28.638 v1(48.566,28.638) ; J5.4 51.177,23.15 51.177,24.777 51.65,25.25 v1(52.25,25.25)
NetJ5_6: J5.6 U1.37 | length 13
  Bottom Layer w0.3: U1.37 44.417,28.055 45.772,26.7 49.3,26.7 49.865,26.135 J5.6
NetJ5_11: J5.11 R13.2 | length 3.3
  Top Layer w0.3: R13.2 44.778,21 v1(46,21)
  Bottom Layer w0.3: v1(46,21) 46,20.959 46.055,20.904 J5.11
NetJ5_13: J5.13 U1.31 | length 22.4
  Mid Layer w0.3: v1(43,29.25) 43,32.324 43.226,32.55 45.828,32.55 46.578,33.3 47.728,33.3 48.375,32.653 v1(48.375,31.75)
  Bottom Layer w0.3: v1(43,29.25) 43,22.3 43.2,22.1 43.2,22.072 44.609,20.663 44.609,19.214 J5.13 ; v1(48.375,31.75) 48.375,31.709 48.405,31.679 U1.31
NetJ5_14: J5.14 U1.30 | length 21.5
  Mid Layer w0.3: v1(42.25,30.75) 42.25,33.25 43.05,34.05 46.264,34.05 46.584,34.371 v1(46.625,34.371)
  Bottom Layer w0.3: v1(42.25,30.75) 43.028,30.75 43.75,30.028 43.75,25.168 44.785,24.133 J5.14 ; v1(46.625,34.371) 46.657,34.371 48.925,32.103 48.925,31.52 48.905,31.5 U1.30
NetR3_1: R3.1 R7.2 U1.17 | length 12.4
  Top Layer w0.3: R3.1 R7.2 47.5,30.5 48,31 50.324,31 50.5,31.176 50.5,34.25 50.971,34.721 51.181,34.721 v1(51.209,34.75)
  Bottom Layer w0.3: v1(51.209,34.75) 51.25,34.75 51.8,35.3 U1.17
NetR4_1: R4.1 R8.2 U1.16 | length 12.9
  Top Layer w0.3: R4.1@49.75,27.275 v1(49.75,28.75)
  Mid Layer w0.3: v1(49.75,28.75) 52,31 52,35.574 52.176,35.75 v1(54.25,35.75)
  Bottom Layer w0.3: U1.16 54.159,35.8 54.209,35.75 v1(54.25,35.75)
NetR10_1: R10.1 R11.2 U1.15 | length 5.6
  Top Layer w0.3: v1(55.25,36.25) 56.4,36.25 56.425,36.225 56.425,36.175 R10.1 R11.2
  Bottom Layer w0.3: U1.15 55.159,36.3 55.209,36.25 v1(55.25,36.25)
NetU1_5: U1.5 U5.2 | length 18.3
  Mid Layer w0.3: v1(47.6,40.1) 47.6,47.6 53.4,53.4 v1(54.4,53.4)
  Bottom Layer w0.15: U5.2@54.496,53.351 U5.2
  Bottom Layer w0.3: v1(47.6,40.1) 47.905,39.795 U1.5
NetU1_6: U1.6 U5.3 | length 16.8
  Mid Layer w0.3: v1(48.271,40.429) 48.271,47.387 52.984,52.1 v1(54.5,52.1)
  Bottom Layer w0.3: v1(48.271,40.429) 48.405,40.295 U1.6
NRST: C11.2 J1.6 J5.12 S1.2 U1.7 | length 43.4
  Top Layer w0.3: J1.6 44.22,33.516 ; 44.25,36.813 44.25,28.472 45,27.722 45,25.102 46.055,24.047 v1(46.055,23.108) ; 44.271,36.834 45.829,38.392 47.392,38.392 v1(49,40) 49,41.563 52.637,45.2 53.95,45.2 C11.2@55,46.25 ; C11.2@55.175,46.425 S1.2@55.175,48.75
  Bottom Layer w0.3: U1.7 48.905,39.864 49,39.959 v1(49,40)
PA0: J2.11 R15.2 U1.10 U5.22 | length 36.1
  Top Layer w0.3: v1(42.045,52.09) 44.23,52.09 R15.2@44.284,52.144 ; v1(50.447,40.022) 50.447,41.447 52.698,43.698 v1(52.698,44.418)
  Bottom Layer w0.3: v1(42.045,52.09) 49.41,52.09 50.3,51.2 50.3,46.2 52.082,44.418 v1(52.698,44.418) 52.739,44.418 52.898,44.259 56.639,44.259 58.596,46.216 J2.11 ; U1.10 50.405,39.939 50.447,39.982 v1(50.447,40.022)
PA1: U1.11 U5.17 | length 14.4
  Top Layer w0.3: v1(42.045,45.09) 42.05,45.095 49.095,45.095 v1(49.1,45.1)
  Mid Layer w0.3: v1(49.1,45.1) 51.25,42.95 v1(51.25,40)
  Bottom Layer w0.3: U1.11 50.905,39.655 v1(51.25,40)
PA8: J1.8 U1.29 | length 21.1
  Top Layer w0.3: J1.8 37.011,35.95 41.309,35.95 41.659,36.3 v1(41.7,36.3)
  Mid Layer w0.3: v1(41.7,36.3) 42,36.6 46.3,36.6 46.7,36.2 46.7,35.3 48.764,33.236 48.764,32.736 v1@49.729,31.771
  Bottom Layer w0.3: U1.29 49.405,31.405 v1(49.75,31.75)
PA15: J5.8 U1.38 | length 14.3
  Top Layer w0.3: v1(43.55,31.006) 43.55,27.4 v1(44.45,26.5)
  Bottom Layer w0.3: v1(43.55,31.006) 43,31.556 43,32.124 43.176,32.3 U1.38 ; v1(44.45,26.5) 44.45,25.726 44.676,25.5 47.228,25.5 48.595,24.133 J5.8
PB0: J2.10 U1.18 | length 15.8
  Top Layer w0.3: v1(55.351,35.15) 58.4,35.15 60.327,37.077 60.327,41.698 J2.10
  Bottom Layer w0.3: U1.18 54.961,34.8 55.311,35.15 v1(55.351,35.15)
PB1: J2.9 U1.19 | length 13.9
  Top Layer w0.3: v1(55.447,34.458) 58.458,34.458 60.815,36.815 60.815,39.646 J2.9
  Bottom Layer w0.3: U1.19 55.01,34.3 55.14,34.43 55.418,34.43 v1(55.447,34.458)
PB2: J2.8 U1.20 | length 12
  Top Layer w0.3: v1(55.443,33.771) 55.472,33.8 56.068,33.8 56.268,34 58.75,34 61.36,36.61 61.36,37.651 J2.8
  Bottom Layer w0.3: U1.20 55.414,33.8 v1(55.443,33.771)
PB3: U1.39 U5.20 | length 22
  Bottom Layer w0.3: U5.20 42.001,49.246 40.446,49.246 39.25,48.05 39.25,35.75 42.2,32.8 U1.39
PB4: U1.40 U5.19 | length 19.4
  Bottom Layer w0.3: U5.19 41.801,47.646 40.546,47.646 39.75,46.85 39.75,36 42.45,33.3 U1.40
PB5: U1.41 U5.18 | length 17
  Bottom Layer w0.3: U5.18 41.901,46.346 40.546,46.346 40.25,46.05 40.25,36.25 42.7,33.8 U1.41
PB6: D2.A J1.10 U1.42 | length 16.8
  Top Layer w0.3: J1.10 37.074,43.676 v1(37.25,43.5)
  Mid Layer w0.3: v1(37.25,43.5) 38,42.75 38,38 39.5,36.5 v1(40.8,36.5)
  Bottom Layer w0.3: v1(40.8,36.5) 40.8,36.459 40.875,36.384 40.875,36.347 42.922,34.3 U1.42
PB7: D1.A J1.11 U1.43 | length 23.6
  Top Layer w0.3: J1.11 37.034,46.216 v1(37.25,46)
  Mid Layer w0.3: v1(37.25,46) 36.5,45.25 36.5,42.75 37.5,41.75 37.5,37.5 40.5,34.5 45.749,34.5 v1(46,34.75)
  Bottom Layer w0.3: U1.43 45.909,34.8 45.959,34.75 v1(46,34.75)
PB8: R19.1 U1.45 U8.13 | length 20.9
  Top Layer w0.2: R19.1 44.2,48.225 45.175,47.25 47.634,47.25 48.198,47.814 U8.13@48.198,48.071
  Top Layer w0.3: U8.13@48.198,48.071 U8.13
  Mid Layer w0.3: v1(41.25,37.25) 41.25,41.5 42.75,43 42.75,46.75 v1(44.2,48.2)
  Bottom Layer w0.3: v1(41.25,37.25) 41.277,37.223 41.577,37.223 43,35.8 U1.45
PB9: R18.1 U1.46 U8.14 | length 25.5
  Top Layer w0.2: R18.1 42.7,48.225 43.075,47.85 43.1,47.85 44.2,46.75 47.85,46.75 48.5,47.4 48.503,47.4 48.698,47.594 U8.14@48.698,48.071
  Top Layer w0.3: R18.1 41.776,48.25 41.6,48.074 41.6,47.5 41.9,47.2 42.3,47.2 43.3,46.2 v1(44.7,46.2) ; U8.14@48.698,48.071 U8.14
  Mid Layer w0.3: v1(42,38.75) 42,40.577 43.99,42.567 43.99,44.768 44.7,45.478 v1(44.7,46.2)
  Bottom Layer w0.3: v1(42,38.75) 42.029,38.721 42.029,37.571 43.3,36.3 U1.46
PB10: J2.7 U1.21 | length 10.8
  Top Layer w0.3: v1(54.9,33) 54.929,32.971 56.221,32.971 56.75,33.5 59,33.5 61.428,35.928 62.177,35.928 J2.7
  Bottom Layer w0.3: U1.21 54.559,33.3 54.859,33 v1(54.9,33)
PB11: J2.5 U1.22 | length 10.2
  Top Layer w0.3: v1(54.8,32) 55.824,30.976 J2.5
  Bottom Layer w0.3: U1.22 54,32.8 v1(54.8,32)
PB12: J2.4 U1.25 | length 11.7
  Top Layer w0.3: v1(52.75,30.25) 54.564,28.436 J2.4
  Bottom Layer w0.3: U1.25 52.688,30.312 v1(52.75,30.25)
PB13: J2.3 U1.26 | length 14.4
  Top Layer w0.3: v1(52.75,28) 54.854,25.896 J2.3
  Bottom Layer w0.3: U1.26 50.905,28.317 51.222,28 v1(52.75,28)
PB14: J2.2 U1.27 | length 16.7
  Top Layer w0.3: v1(52.75,26.5) 55.894,23.356 J2.2
  Bottom Layer w0.3: U1.27 50.405,27.095 51,26.5 v1(52.75,26.5)
PB15: J1.7 U1.28 | length 21.5
  Mid Layer w0.3: J1.7 37,33.421 37,32.472 41.272,28.2 43.841,28.2 44.141,28.5 v1(45,28.5)
  Bottom Layer w0.3: v1(45,28.5) 45.5,28 48.706,28 49.116,28.41 49.116,29.124 49.292,29.3 49.729,29.3 49.905,29.476 U1.28
PC13: J1.9 U1.2 U8.4 | length 25
  Top Layer w0.3: J1.9 34.472,41.029 46.371,41.029 v1(46.4,41) 46.441,41 49.95,44.509 49.95,49.574 49.777,49.748 49.384,49.748 U8.4
  Bottom Layer w0.3: v1(46.4,41) 46.405,40.995 U1.2
Vbat: C13.2 C15.2 J1.4 R9.2 R12.1 U3.3 U4.3 | length 43.6
  Top Layer w0.5: J1.4 36.564,28.436 36.75,28.25 ; U3.3@38.125,21.5 36.75,21.5 ; U4.3@38.125,30 37.5,30 36.75,29.25 36.75,28.25 ; C15.2 36.75,25.75 ; C13.2 36.75,27.25 ; R9.2 41.75,16.5 ; R12.1 42.25,15 41.75,15.5 41.75,16.5 ; 36.75,21.5 36.75,25.75 ; 36.75,21.5 36.75,20.25 37.75,19.25 40.75,19.25 41.75,18.25 41.75,16.5 ; 36.75,25.75 36.75,27.25 ; 36.75,27.25 36.75,28.25
Vbus: C10.1 J1.3 J3.A4 J3.B4 R9.1 R10.2 U2.5 | length 69.4
  Top Layer w0.3: J3.A4@46.255,17.89 46.411,17.734 46.411,16.889 v1(47.6,15.7) ; v1(49.4,15.7) 49.429,15.729 49.643,15.729 50.8,16.886 50.8,17.023 50.911,17.135 50.911,17.746 J3.B4@51.055,17.89 ; R10.2 58.389,36.639 v1(59.111,36.639)
  Top Layer w0.5: U2.5 v1(48.75,25)
  Mid Layer w0.3: v1(52.5,21.25) 55,21.25 57.25,23.5 58.5,23.5 59.75,24.75 59.75,36 v1(59.111,36.639)
  Mid Layer w0.6: J1.3 38.511,21.75 42.74,21.75 44,20.49 44,20 ; v1(40.5,15) 40.5,16.5 44,20 ; v1(47.6,15.7) v1(49.4,15.7) 49.7,15.7 50.5,16.5 50.5,20 ; v1(48.75,25) 48.75,23.503 49.501,22.751 49.999,22.751 50.5,22.25 50.5,21.25 ; v1(52.5,21.25) 50.5,21.25 ; 44,20 50.5,20 ; 50.5,20 50.5,21.25
pads on no net: J3.A8 J3.B8 J3.MH1 J3.MH2 J5.1 J5.2 J5.9 J5.10 U5.1 U5.4 U5.9 U5.10 U5.11 U5.12 U5.13 U5.14 U5.15 U8.9

## Polygon pours and split planes (outlines as drawn)
GND on Top Layer "GND_L01_P000" (solid, remove dead copper, pour order 0): 30.9,58.2 31,58.1 66,58.1 66,9 65.6,8.6 65.5,8.7 29.1,8.7
GND on Bottom Layer "GND_L06_P002" (solid, remove dead copper, pour order 2): 30.9,58.3 66.4,58.3 66.4,6.9 30.1,6.9
GND on Mid Layer "GND_L03_P001" (solid, remove dead copper, pour order 1): 31.2,58 66.2,58 66.2,8.6 30.5,8.6
GND on Top Ground "GND_L02_P003" (solid, pour order 3): 31.75,57.25 64.75,57.25 64.75,10.5 31.75,10.5
MCU_3V3 on MCU_3V3 "MCU_3V3_L04_P004" (solid, pour order 4): 31,57.5 66.75,57.5 67,57.25 67,10.25 31.5,10.25 31.25,10.5
GND on Bottom Ground "GND_L05_P005" (solid, pour order 5): 31.75,58 32,57.75 66.75,57.75 66.75,10.5 65.75,9.5 31.5,9.5 31.5,10.5 31,11

## Silkscreen, mask and mechanical layers (free items; w line width, h text height)
Top Overlay:
  text "TX" at 52.353,31.703 h1
  text "RX" at 52.353,29.303 h1
  text "CK" at 52.353,26.703 h1
  text "-" at 53.353,24.028 h1
  text "+" at 53.353,21.761 h1
Bottom Overlay:
  region: 58.475,13.05 58.475,13.044 58.475,12.445 54.95,12.445 54.95,15.964 58.475,15.964 hole: 56.818,15.03 55.52,15.03 55.52,14.666 56.166,14.666 56.166,14.66 56.201,14.66 56.201,14.654 56.225,14.654 56.225,14.648 56.243,14.648 56.243,14.642 56.254,14.642 56.254,14.636 56.266,14.636 56.266,14.63 56.278,14.63 56.278,14.624 56.284,14.624 56.284,14.619 56.295,14.619 56.295,14.613 56.301,14.613 56.301,14.607 56.313,14.607 56.313,14.601 56.319,14.601 56.319,14.595 56.325,14.595 56.325,14.589 56.331,14.589 56.331,14.583 56.337,14.583 56.337,14.577 56.342,14.577 56.342,14.572 56.348,14.572 56.348,14.566 56.354,14.566 56.354,14.554 56.36,14.554 56.36,14.548 56.366,14.548 56.366,14.542 56.372,14.542 56.372,14.53 56.378,14.53 56.378,14.519 56.384,14.519 56.384,14.507 56.389,14.507 56.389,14.495 56.395,14.495 56.395,14.472 56.401,14.472 56.401,14.442 56.407,14.442 56.407,13.156 56.407,13.15 56.407,13.026 56.818,13.026 hole: 57.905,15.429 56.818,15.429 56.818,15.03 57.911,15.03 57.911,15.423 57.905,15.423
  lines w0.153: 48.775,16.2 48.775,15.05 48.775,14.725 49.055,14.445 ; 49.075,14.425 49.875,15.225 49.969,15.319 49.969,16.189 ; 49.15,26.8 49.45,26.8 49.7,26.55 49.7,25.5 ; 50.9,14.575 50.9,16.675 ; 51.25,25.475 51.25,26.525 51.5,26.775 51.8,26.775
  text "GND" at 60.697,48.478 h1
  text "GND" at 38.548,48.228 h1
  text "A1" at 60.697,45.911 h1
  text "B7" at 37.553,45.661 h1
  text "B0" at 60.697,43.345 h1
  text "B6" at 37.506,43.095 h1
  text "B1" at 60.697,40.778 h1
  text "C13" at 38.391,40.528 h1
  text "B2" at 60.697,38.211 h1
  text "A8" at 37.658,37.961 h1
  text "B10" at 60.697,35.645 h1
  text "B15" at 38.286,35.395 h1
  text "MCU_3V3" at 60.697,33.611 h1
  text "NRST" at 39.386,32.828 h1
  text "B11" at 60.697,30.453 h1
  text "DWM_3V3" at 42.424,30.261 h1
  text "B12" at 60.697,28.078 h1
  text "Vbat" at 38.891,27.528 h1
  text "DIO" at 54.847,26.403 h1
  text "CLK" at 48.647,26.328 h1
  text "B13" at 60.697,25.578 h1
  text "VBUS" at 39.386,24.961 h1
  text "B14" at 60.697,23.178 h1
  text "TX" at 43.397,22.578 h1
  text "Vusart" at 40.096,22.428 h1
  text "GND" at 60.697,20.078 h1
  text "GND" at 38.548,19.828 h1
  text "RX" at 43.397,19.578 h1
  text "GND" at 49.422,13.053 h1
  text "VCC" at 52.947,13.003 h1
  text "J.J. / Bauer" at 44.1,12.325 h1